# EAGLE board Lamp Logic Board_40 BRAIN (EAGLE 9.5.1)
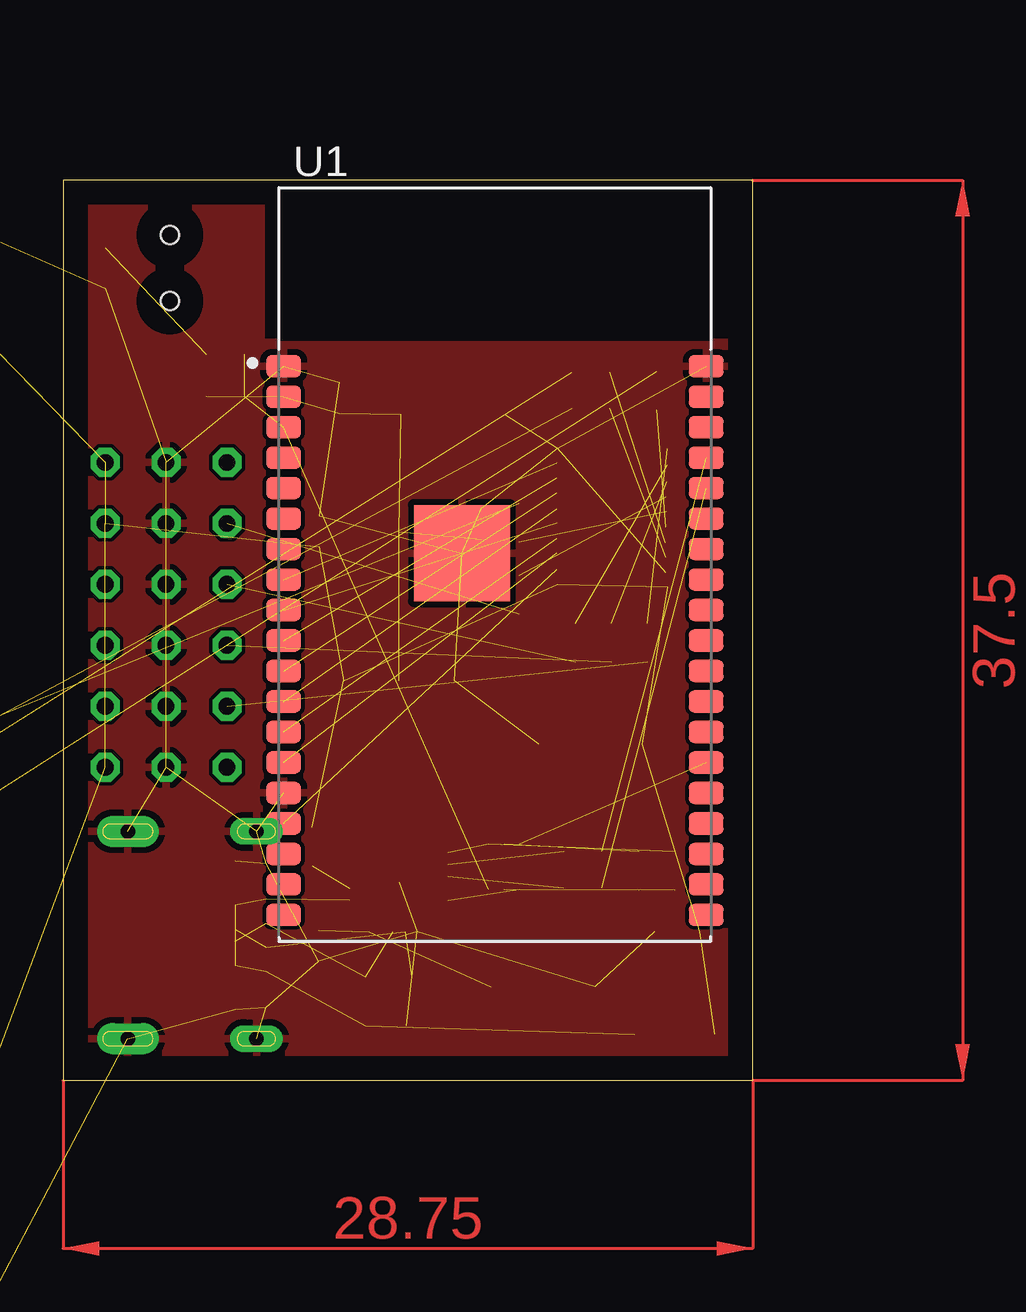
[diagram p0: board, top side]
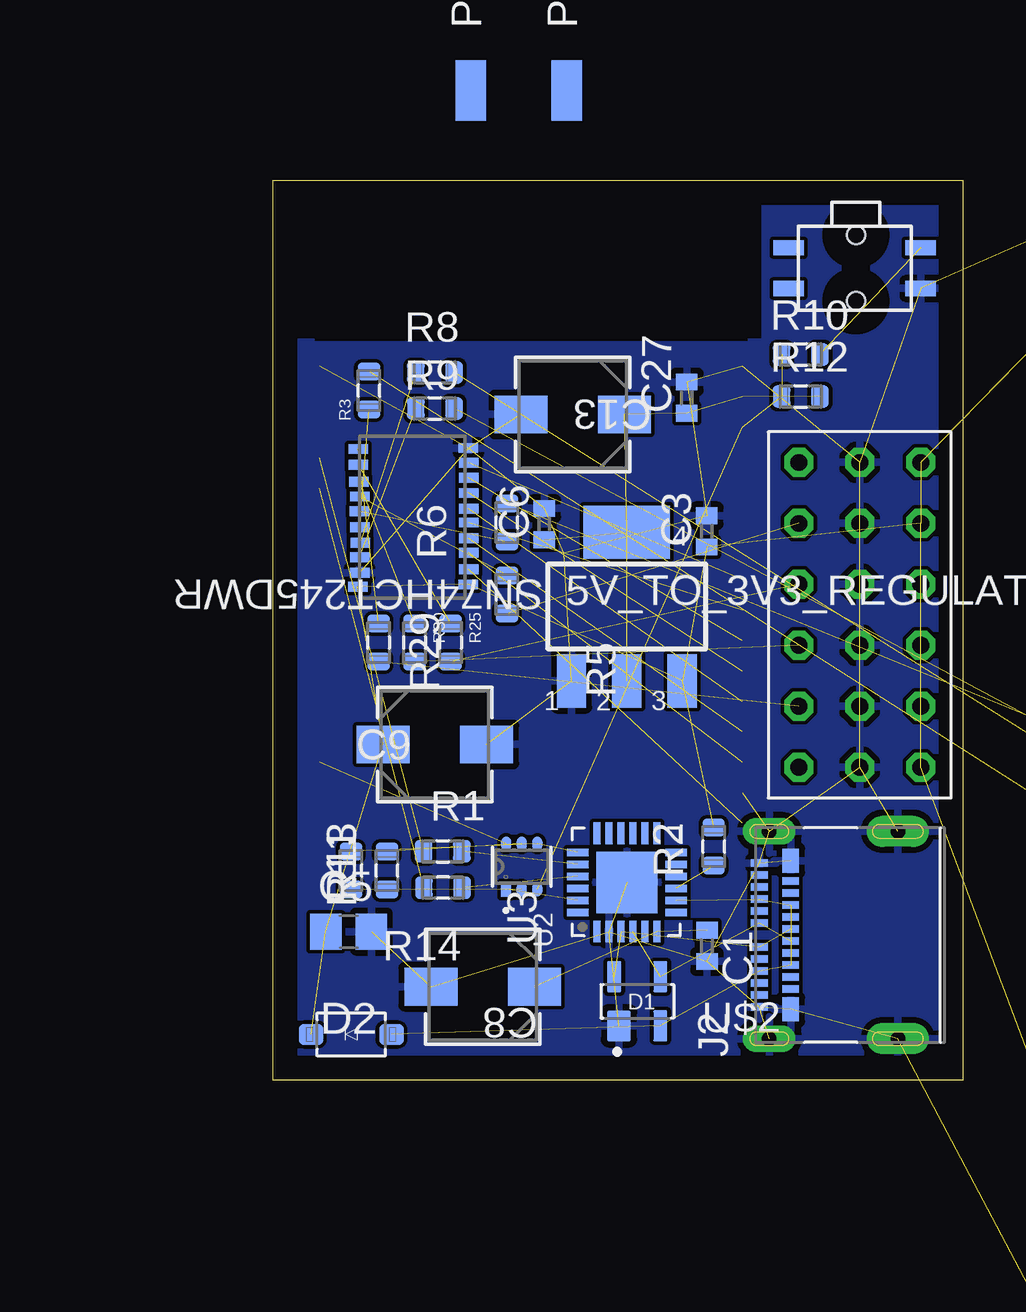
[diagram p1: board, bottom side, seen from below]

Size 28.75 x 37.5 mm. Coordinates in mm from the lower left corner, seen from the top.
Outline: 0,0 28.75,0 28.75,37.5 0,37.5 0,0
Copper layers (1*16): Top 0.035mm / dielectric 1.5mm / Bottom 0.035mm
Design rules "default *": minimum track width 0.2mm, minimum drill 0.25mm, track to track 6mil, track to pad 6mil, pad to pad 6mil, via to via 6mil, smd to smd 6mil, copper to edge 40mil, drill to drill 6mil, minimum pad ring 10mil, minimum via ring 8mil, stop-mask expansion 4mil, vias tented up to drill 0mil, thermal gap 10mil
Net classes: 1 LED Data: width 0.305 mm, drill 0.25 mm

## Footprints (pad centres in the part's own frame; a part is rotated, then mirrored left to right if it is on the bottom)
SOT223 = smd 1.219 x 2.235: 1 -2.311,-3.099; 2 0,-3.099; 3 2.311,-3.099 | smd 3.6 x 2.2: 4 0,3.099
C0402 = smd 0.7 x 0.9: 1 -0.65,0; 2 0.65,0
C0805 = smd 1.3 x 1.5: 1 -0.95,0; 2 0.95,0
CAP_EEFC_B = smd 2.21 x 1.575: 1 -2.159,0; 2 2.159,0
SOT143 = smd 0.99 x 1.3: 1 -0.76,-1.025 | smd 0.59 x 1.3: 2 0.96,-1.025; 3 0.96,1.025; 4 -0.96,1.025
SOD-123 = smd 1.02 x 0.86: A 1.68,0; C -1.68,0
MOLEX_105450-0101 = smd 0.3 x 0.7: A1 -3,3.77; A2 -2.5,3.77; A3 -2,3.77; A4 -1.5,3.77; A5 -1,3.77; A6 -0.5,3.77; A7 0.5,3.77; A8 1,3.77; A9 1.5,3.77; A10 2,3.77; A11 2.5,3.77; A12 3,3.77; B2 2.25,2.47; B3 1.75,2.47; B4 1.25,2.47; B5 0.75,2.47; B6 0.25,2.47; B7 -0.25,2.47; B8 -0.75,2.47; B9 -1.25,2.47; B10 -1.75,2.47; B11 -2.25,2.47 | smd 1 x 0.7: B1 3.1,2.47; B12 -3.1,2.47 | drill 0.6 pad 1.1 long: S1 -4.32,3.36; S2 4.32,3.36 | drill 0.6 pad 1.3 long: S3 -4.32,-2; S4 4.32,-2
SMD1,27-2,54 = smd 1.27 x 2.54: 1 0,0
RES_0603 = smd 0.74 x 0.93: 1 -0.795,0; 2 0.795,0
PW = smd 0.813 x 0.406: 1 -0.148,-0.418; 2 -0.152,-1.056; 3 -0.152,-1.736; 4 -0.152,-2.34; 5 -0.152,-2.995; 6 -0.156,-3.575; 7 -0.152,-4.233; 8 -0.152,-4.859; 9 -0.152,-5.488; 10 -0.148,-6.098; 11 4.446,-6.065; 12 4.441,-5.404; 13 4.412,-4.699; 14 4.382,-4.082; 15 4.408,-3.466; 16 4.382,-2.796; 17 4.357,-2.151; 18 4.382,-1.548; 19 4.382,-0.908; 20 4.467,-0.317
XCVR_ESP32-WROVER-I = smd 1.45 x 0.93: 1 -8.81,8.26; 2 -8.81,6.99; 3 -8.81,5.72; 4 -8.81,4.45; 5 -8.81,3.18; 6 -8.81,1.91; 7 -8.81,0.64; 8 -8.81,-0.63; 9 -8.81,-1.9; 10 -8.81,-3.17; 11 -8.81,-4.44; 12 -8.81,-5.71; 13 -8.81,-6.98; 14 -8.81,-8.25; 15 -8.81,-9.52; 16 -8.81,-10.79; 17 -8.81,-12.06; 18 -8.81,-13.33; 19 -8.81,-14.6; 20 8.81,-14.6; 21 8.81,-13.33; 22 8.81,-12.06; 23 8.81,-10.79; 24 8.81,-9.52; 25 8.81,-8.25; 26 8.81,-6.98; 27 8.81,-5.71; 28 8.81,-4.44; 29 8.81,-3.17; 30 8.81,-1.9; 31 8.81,-0.63; 32 8.81,0.64; 33 8.81,1.91; 34 8.81,3.18; 35 8.81,4.45; 36 8.81,5.72; 37 8.81,6.99; 38 8.81,8.26 | smd 4 x 4: 39 -1.38,0.47
SILABS_CP2102N-A02-GQFN24R = smd 0.9 x 0.3: 1 -1.55,1.75; 2 -1.55,1.25; 3 -1.55,0.75; 4 -1.55,0.25; 5 -1.55,-0.25; 6 -1.55,-0.75; 13 2.55,-0.75; 14 2.55,-0.25; 15 2.55,0.25; 16 2.55,0.75; 17 2.55,1.25; 18 2.55,1.75 | smd 0.3 x 0.9: 7 -0.75,-1.55; 8 -0.25,-1.55; 9 0.25,-1.55; 10 0.75,-1.55; 11 1.25,-1.55; 12 1.75,-1.55; 19 1.75,2.55; 20 1.25,2.55; 21 0.75,2.55; 22 0.25,2.55; 23 -0.25,2.55; 24 -0.75,2.55 | smd 2.55 x 2.55: 25 0.5,0.5
SOT-363 = smd 0.6 x 0.42: 1 -0.95,0.65; 2 -0.95,0; 3 -0.95,-0.65; 4 0.95,-0.65; 5 0.95,0; 6 0.95,0.65
3X8PINHEAD = drill 0.7 octagon: 1 0,0; 2 2.54,0; 3 5.08,0; 4 7.62,0; 5 10.16,0; 6 12.7,0; 9 0,-2.54; 10 2.54,-2.54; 11 5.08,-2.54; 12 7.62,-2.54; 13 10.16,-2.54; 14 12.7,-2.54; 17 0,-5.08; 18 2.54,-5.08; 19 5.08,-5.08; 20 7.62,-5.08; 21 10.16,-5.08; 22 12.7,-5.08
TL1014BF160QG = smd 1.27 x 0.635: P$1 0,0; P$2 5.5,0; P$3 0,-1.7; P$4 5.5,-1.7 | hole 0.75: 2.7,0.525; 2.7,-2.225

## Placement (x,y rotation side)
5V_TO_3V3_REGULATOR  [SOT223]  14,19.75 0 bottom
C1  0.1uF  [C0402]  10.66,5.61 270 bottom
C3  1uF  [C0402]  10.67,22.88 90 bottom
C5  0.1uF  [C0805]  25.6,6.2 0 bottom
C6  1uF  [C0402]  17.44,23.18 90 bottom
C8  1uF  [CAP_EEFC_B]  20,3.9 180 bottom
C9  1uF  [CAP_EEFC_B]  22,14 0 bottom
C13  100uF  [CAP_EEFC_B]  16.25,27.75 180 bottom
C27  1uF  [C0402]  11.5,28.45 90 bottom
D1  SP0503BAHTG  [SOT143]  13.57,3.3 0 bottom
D2  MBR0520LT1G  [SOD-123]  25.49,1.92 0 bottom
J2  105450-0101  [MOLEX_105450-0101]  4.7,6.06 90 bottom
PAD1  VCC  [SMD1,27-2,54]  20.5,41.25 0 bottom  (outside the outline)
PAD2  GND  [SMD1,27-2,54]  16.5,41.25 0 bottom  (outside the outline)
PAD3  TX  [SMD1,27-2,54]  -5.75,-14.25 0 bottom  (outside the outline)
PAD4  RX  [SMD1,27-2,54]  -4.5,35.75 270 bottom  (outside the outline)
PAD5  DTR  [SMD1,27-2,54]  -8,35.75 270 bottom  (outside the outline)
PAD6  RTS  [SMD1,27-2,54]  -8.5,-14.25 0 bottom  (outside the outline)
R1  330  [RES_0603]  21.68,9.55 0 bottom
R2  12k  [RES_0603]  10.38,9.75 90 bottom
R3  330  [RES_0603]  24.75,28.75 90 bottom
R5  330  [RES_0603]  19,20.25 270 bottom
R6  330  [RES_0603]  19,23.25 90 bottom
R8  330  [RES_0603]  22,29.5 0 bottom
R9  330  [RES_0603]  22,28 0 bottom
R10  330  [RES_0603]  6.75,30.25 0 bottom
R11  12k  [RES_0603]  25.5,8.75 90 bottom
R12  12k  [RES_0603]  6.75,28.5 0 bottom
R13  12k  [RES_0603]  24,8.75 90 bottom
R14  330  [RES_0603]  21.66,8.03 180 bottom
R25  330  [RES_0603]  21.35,18.25 270 bottom
R29  330  [RES_0603]  24.35,18.25 270 bottom
R30  330  [RES_0603]  22.85,18.25 270 bottom
SN74HCT245DWR  SN74HCT245DWRPW  [PW]  20.75,20.25 180 bottom
U1  ESP32-WROVER-IB  [XCVR_ESP32-WROVER-I]  18,21.5 0 top
U2  CP2102N-A02-GQFN24R  [SILABS_CP2102N-A02-GQFN24R]  13.5,7.75 90 bottom
U3  MMDT3904-7-F  [SOT-363]  18.38,8.91 90 bottom
U$1  3X8PINHEAD  [3X8PINHEAD]  -27.5,-3 90 top  (outside the outline)
U$2  3X8PINHEAD  [3X8PINHEAD]  1.75,25.75 270 bottom
U$7  TL1014BF160QG  [TL1014BF160QG]  1.75,33 180 bottom

## Library data of the parts
5V_TO_3V3_REGULATOR = lm1117; MF: Texas Instruments; MPN: LM1117MP-1.8; OC_FARNELL: 1469053; OC_NEWARK: 41K3467
C1 C3 C5 C6 C27 = resistor
C8 C9 C13 = EEE-FC1V1R0R; MANUFACTURER_PART_NUMBER: EEEFC1V1R0R; VENDOR: Panasonic
D1 = SP0503BAHTG; DESCRIPTION: SP050xBA Series 8 V 30 pF Uni-Directional SMT TVS Avalanche Diode Array SOT-143; DIGI-KEY_PART_NUMBER: F2715CT-ND; DIGI-KEY_PURCHASE_URL: https://www.digikey.com/product-detail/en/littelfuse-inc/SP0503BAHTG/F2715CT-ND/1154322?utm_source=snapeda&utm_medium=aggregator&utm_campaign=symbol; MF: Littelfuse Inc.; MP: SP0503BAHTG; PACKAGE: SOT-143 Littelfuse
D2 = Diodes; CREATED_BY: PCBLayout.com; DIGIKEY_PART_NUMBER: MBR0520LT1GOSTR-ND; MANUFACTURER: ON Semiconductor; MPN: MBR0520LT1G; PACKAGE: SOD-123
J2 = 105450-0101; DESCRIPTION: USB Shielded I/O Receptacle; Type C; Right Angle; Surface Mount; Gold over Nickel; DIGI-KEY_PART_NUMBER: WM12856CT-ND; DIGI-KEY_PURCHASE_URL: https://www.digikey.com/product-detail/en/molex/1054500101/WM12856CT-ND/5843891?utm_source=snapeda&utm_medium=aggregator&utm_campaign=symbol; MF: Molex; MP: 1054500101; PACKAGE: None
PAD1-PAD6 = wirepad
R1-R3 R5 R6 R8-R14 R25 R29 R30 = Resistor_Capacitor; CREATED_BY: PCBLayout.com; DIGIKEY_PART_NUMBER: 311-0.0GRTR-ND; MANUFACTURER: Yageo; MPN: RC0603JR-070RL; PACKAGE: SMD 0603
SN74HCT245DWR = SN74HCT245DWR 
U1 = ESP32-WROVER-I; AVAILABILITY: Unavailable; DESCRIPTION: Module: combo; GPIO, I2C x2, I2S x2, SDIO, SPI x3, UART x3; U.FL; MF: Espressif Systems; MP: ESP32-WROVER-I; PACKAGE: Module Espressif Systems; PRICE: None
U2 = CP2102N-A02-GQFN20R
U3 = MMDT3904; MANUFACTURER_PART_NUMBER: MMDT39047F; VENDOR: Diodes Inc
U$1 U$2 = 3X8PINHEAD
U$7 = TL1014BF160QG

## Nets
BCK [LED Data]: U1.5
D+ [LED Data]: D1.4 J2.A6 J2.B6 U2.3
D- [LED Data]: D1.3 J2.A7 J2.B7 U2.4
DOUT [LED Data]: U1.6
DTR [LED Data]: R13.1 U2.23 U3.1
EN [LED Data]: R10.1 R12.1 U1.3 U3.3
GND: 5V_TO_3V3_REGULATOR.1 C1.2 C3.2 C5.2 C6.2 C8.2 C9.2 C13.2 C27.2 D1.1 J2.A1 J2.A12 J2.B1 J2.B12 J2.S1 J2.S2 J2.S3 J2.S4 PAD3.1 PAD4.1 SN74HCT245DWR.10 SN74HCT245DWR.19 U1.1 U1.15 U1.38 U1.39 U2.2 U2.25 U$1.9 U$1.10 U$1.11 U$1.12 U$1.13 U$1.14 U$2.9 U$2.10 U$2.11 U$2.12 U$2.13 U$2.14 U$7.P$1
LEDS1_3V3 [LED Data]: U1.37
LEDS2_3V3 [LED Data]: U1.36
LEDS3_3V3 [LED Data]: U1.33
LEDS4_3V3 [LED Data]: R1.1 U1.35
LEDS5_3V3 [LED Data]: U1.31
LEDS6_3V3 [LED Data]: U1.30
LEDS7_3V3 [LED Data]: U1.29
LEDS7_5V [LED Data]: R29.2 U$2.21
LEDS8_3V3 [LED Data]: U1.26
LEDS8_5V [LED Data]: R30.2 U$2.20
LEDS9_3V3 [LED Data]: SN74HCT245DWR.9 U1.8
LEDS9_5V [LED Data]: R25.2 U$2.19
LEDS10_3V3 [LED Data]: SN74HCT245DWR.8 U1.10
LEDS10_5V [LED Data]: R5.2 U$2.18
LEDS11_3V3 [LED Data]: SN74HCT245DWR.7 U1.11
LEDS11_5V [LED Data]: U$2.17
LEDS12_3V3 [LED Data]: SN74HCT245DWR.6 U1.12
LEDS12_5V [LED Data]: U$1.22
LEDS13_3V3 [LED Data]: SN74HCT245DWR.5 U1.9
LEDS13_5V [LED Data]: R6.2 U$1.21
LEDS14_3V3 [LED Data]: SN74HCT245DWR.4 U1.13
LEDS14_5V [LED Data]: R9.2 U$1.20
LEDS15_3V3 [LED Data]: SN74HCT245DWR.3 U1.14
LEDS15_5V [LED Data]: R8.2 U$1.19
LEDS16_3V3 [LED Data]: SN74HCT245DWR.2 U1.16
LEDS16_5V [LED Data]: R3.2 U$1.18
LRCK [LED Data]: U1.4
N$1 [LED Data]: R9.1 SN74HCT245DWR.18
N$5 [LED Data]: C1.1 C8.1 U2.6
N$7 [LED Data]: R11.1 U3.2
N$8 [LED Data]: R13.2 U3.5
N$9 [LED Data]: R10.2 U$7.P$3
N$11 [LED Data]: R6.1 SN74HCT245DWR.15
N$12 [LED Data]: R5.1 SN74HCT245DWR.14
N$14 [LED Data]: R8.1 SN74HCT245DWR.17
N$18 [LED Data]: R14.1 U2.21
N$19 [LED Data]: R3.1 SN74HCT245DWR.16
N$26 [LED Data]: R29.1 SN74HCT245DWR.11
N$28 [LED Data]: R2.1 U2.9
N$32: PAD2.1
N$33: PAD1.1
N$34 [LED Data]: R30.1 SN74HCT245DWR.13
N$35 [LED Data]: R25.1 SN74HCT245DWR.12
RTS [LED Data]: R11.2 U2.19 U3.4
RX0 [LED Data]: R14.2 U1.34
SCKI [LED Data]: U1.25 U3.6
TX_CONTROLLER [LED Data]: R1.2 U2.20
VDD3V3: 5V_TO_3V3_REGULATOR.2 5V_TO_3V3_REGULATOR.4 C6.1 C13.1 C27.1 R12.2 U1.2
VDD5V: 5V_TO_3V3_REGULATOR.3 C3.1 C5.1 C9.1 D2.C PAD5.1 PAD6.1 R2.2 SN74HCT245DWR.1 SN74HCT245DWR.20 U$1.1 U$1.2 U$1.3 U$1.4 U$1.5 U$1.6 U$2.1 U$2.2 U$2.3 U$2.4 U$2.5 U$2.6
VDD5VUSB: D1.2 D2.A J2.A4 J2.A9 J2.B4 J2.B9 U2.8
VREGIN [LED Data]: U2.7

## Tracks (layer width: path | path; a pad name or v marks a point on that pad's centre or on a via)
D+  (3 unrouted)
D-  (3 unrouted)
DTR  (2 unrouted)
EN  (3 unrouted)
GND  (40 unrouted)
  pour Bottom: 0.25,37.5 8,37.5 8.25,37.25 8.25,30.75 28.75,30.75 28.75,0.75 0.25,0.75
  pour Top: 0.25,37.5 8.25,37.5 8.25,30.75 28.75,30.75 28.75,0.75 0.25,0.75
LEDS4_3V3  (1 unrouted)
LEDS7_5V  (1 unrouted)
LEDS8_5V  (1 unrouted)
LEDS9_3V3  (1 unrouted)
LEDS9_5V  (1 unrouted)
LEDS10_3V3  (1 unrouted)
LEDS10_5V  (1 unrouted)
LEDS11_3V3  (1 unrouted)
LEDS12_3V3  (1 unrouted)
LEDS13_3V3  (1 unrouted)
LEDS13_5V  (1 unrouted)
LEDS14_3V3  (1 unrouted)
LEDS14_5V  (1 unrouted)
LEDS15_3V3  (1 unrouted)
LEDS15_5V  (1 unrouted)
LEDS16_3V3  (1 unrouted)
LEDS16_5V  (1 unrouted)
N$1  (1 unrouted)
N$5  (2 unrouted)
N$7  (1 unrouted)
N$8  (1 unrouted)
N$9  (1 unrouted)
N$11  (1 unrouted)
N$12  (1 unrouted)
N$14  (1 unrouted)
N$18  (1 unrouted)
N$19  (1 unrouted)
N$26  (1 unrouted)
N$28  (1 unrouted)
N$34  (1 unrouted)
N$35  (1 unrouted)
RTS  (2 unrouted)
RX0  (1 unrouted)
SCKI  (1 unrouted)
TX_CONTROLLER  (1 unrouted)
VDD3V3  (6 unrouted)
VDD5V  (21 unrouted)
VDD5VUSB  (6 unrouted)
(copper drawn outside any net)
  shapes: Top area x2